# Altium PCB mainboard.PCBDOC
Units mil, origin at the board's own origin, x right, y up, seen from the top; angles counter-clockwise.
Board outline 6000 x 4000 mil, 2 copper layers (Top Layer, Bottom Layer); 25 components, 50 nets, 170 pads, 0 vias.
Unrouted connection lines stored in the file: 59.
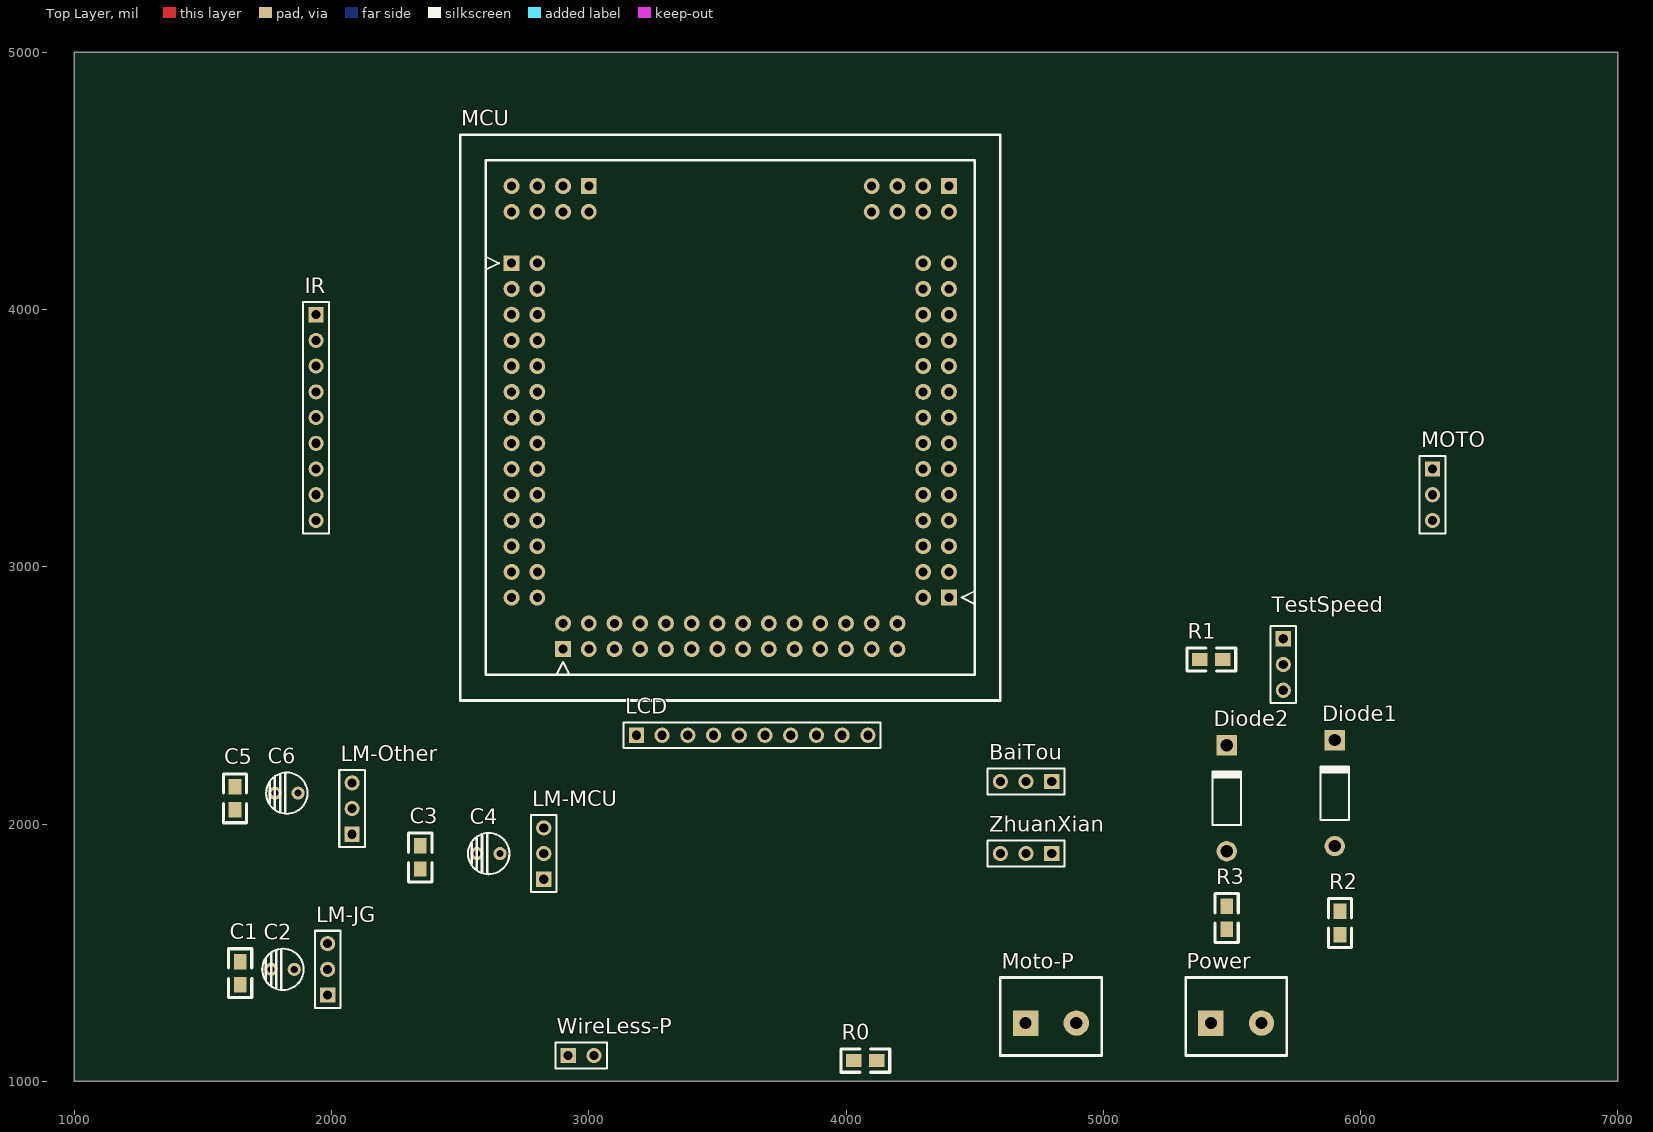
[diagram p0: Top Layer view]
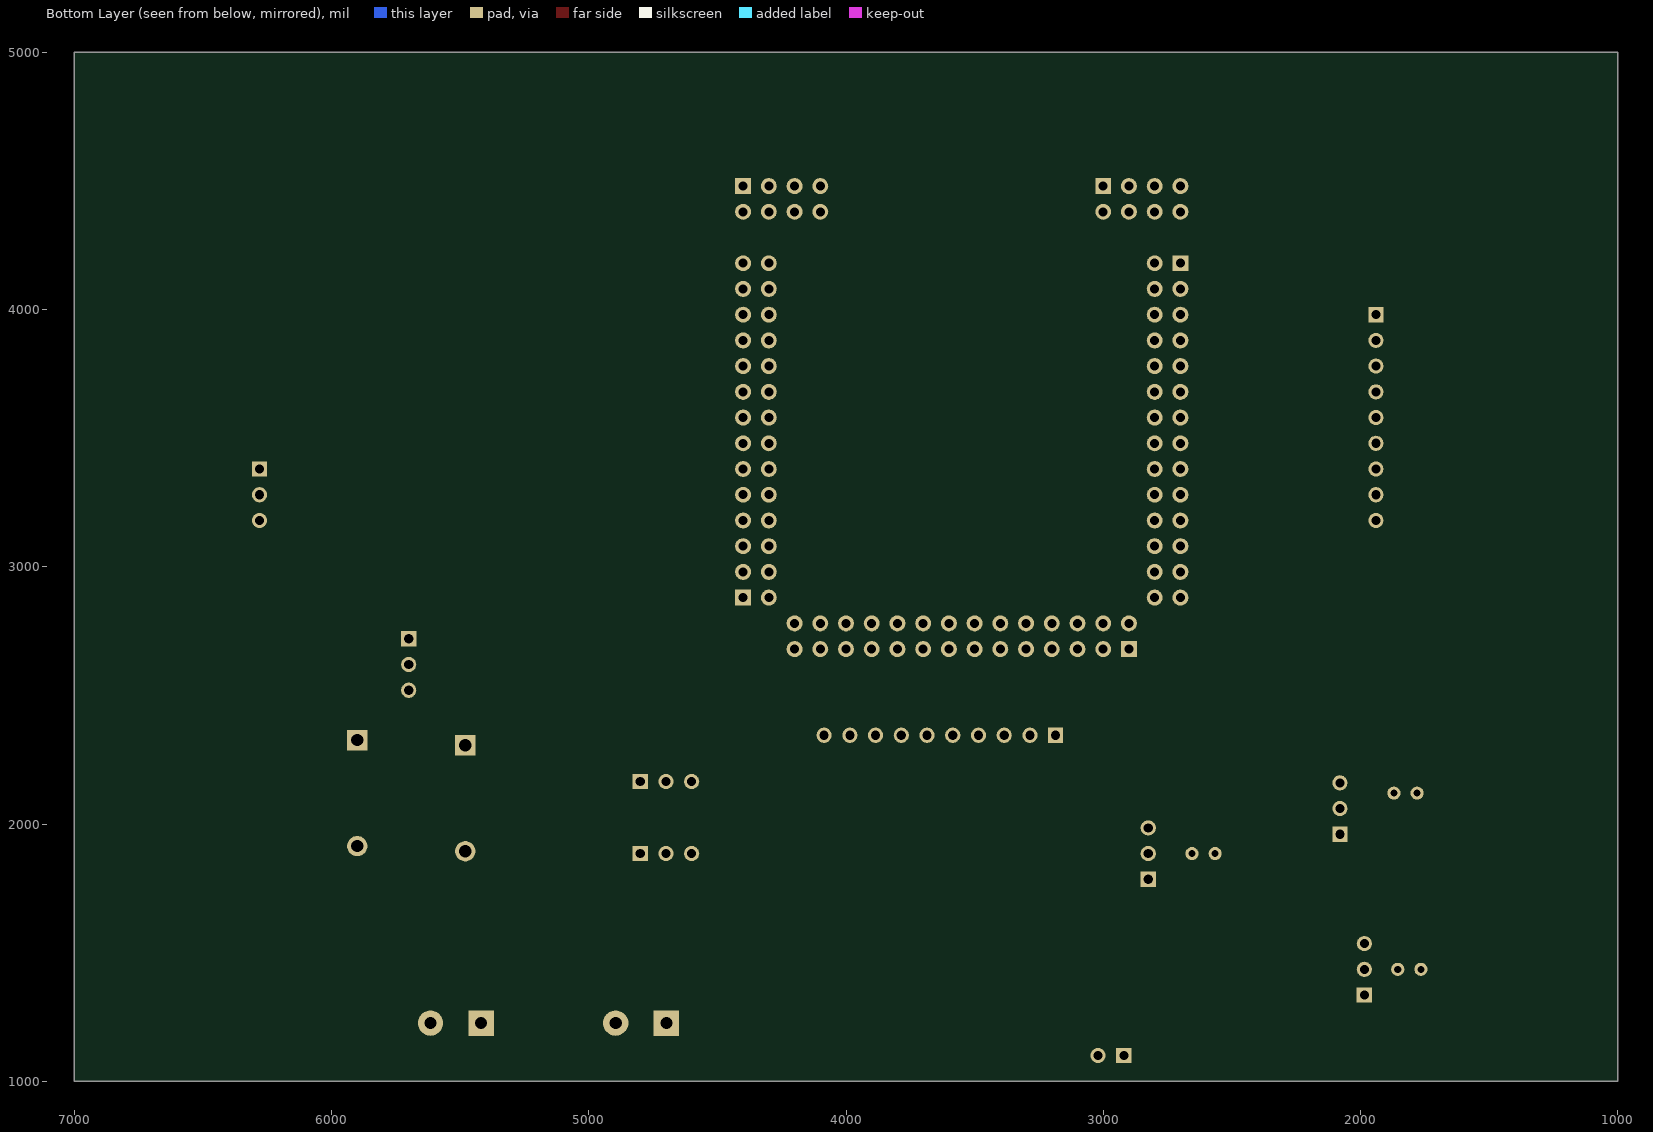
[diagram p1: Bottom Layer view, seen from below]

## Layer stack, top to bottom
Top Layer: signal copper 1.4
Dielectric: dielectric 12.6, FR-4, Dk 4.8
Bottom Layer: signal copper 1.4

## Board outline
1000,1000 7000,1000 7000,5000 1000,5000

## Design rules (kind name [scope] priority, off if disabled: settings)
Clearance [All] p1: gap=10
ComponentClearance [All] p1: gap=10 collisioncheckmode=3 verticalgap=10
PolygonConnect [All] p1: connectstyle=Relief reliefconductorwidth=10 reliefentries=4 polygonreliefangle="90 Angle"
RoutingVias [All] p1: holewidth=28 width=50 viastyle="Through Hole" minholewidth=28 minwidth=50 maxholewidth=28 maxwidth=50
SolderMaskExpansion [All] p1: expansion=4
TestPointUsage [All] p1: valid=0 allowmultiple=FALSE
Testpoint [All] p1: side=15 testpointundercomponent=TRUE minsize=40 maxsize=100 preferedsize=60 minholesize=0 maxholesize=40 preferedholesize=32 testpointgrid=1 style=1023 order=0123456789
Width [All] p1: maxlimit=10 minlimit=10 preferedwidth=10
18 further rules are at their usual default settings.

## Classes and differential pairs
component class MCU: MCU

## Components (designator, comment, footprint, x,y, rotation, side; value= is the part's Value field where it differs from the comment)
BaiTou "激光摆头舵机接口" HDR1X3 4800,2165 r180 top
C1 "47uF" 0805 1645,1375 r90 top
C2 "47uF" CD4 1805,1435 r0 top
C3 "47uF" 0805 2345,1825 r90 top
C4 "47uF" CD4 2605,1885 r0 top
C5 "47uF" 0805 1625,2055 r90 top
C6 "47uF" CD4 1820,2120 r0 top
Diode1 "Diode 1N5819" DO-41 5900,2120 r90 top
Diode2 "Diode 1N5819" DO-41 5480,2100 r90 top
IR "红外模块接口" HDR1X9 1940,3980 r270 top
LCD "LCD显示接口" HDR1X10 3185,2345 r0 top
LM-JG "激光供电模块" HDR1X3 1985,1335 r90 top
LM-MCU "单片机供电模块" HDR1X3 2825,1785 r90 top
LM-Other "其他供电模块" HDR1X3 2080,1960 r90 top
MCU "龙丘单片机" LQ_112_BOARD 2900,2680 r90 top
MOTO "电机模块" HDR1X3 6280,3380 r270 top
Moto-P "电机电源" tongzhu 4600,1100 r0 top
Power "电源" tongzhu 5320,1100 r0 top
R0 "0欧姆" 0805 4120,1080 r180 top
R1 "测速电阻" 0805 5465,2640 r180 top
R2 "6欧姆" 0805 5920,1660 r270 top
R3 "6欧姆" 0805 5480,1680 r270 top
TestSpeed "测速模块" HDR1X3 5700,2720 r270 top
WireLess-P "无线电源模块" HDR1X2 2920,1100 r0 top
ZhuanXian "摆角舵机" HDR1X3 4800,1885 r180 top

## Footprints (in the part's own frame and the unit in brackets; to place one, negate y for a bottom-side part, rotate by r counter-clockwise, add the part's x,y. Pads: shape width x height; smd on the part's side, far side on the other; paste and mask are expansions set on the pad)
0805 [mil]
  rect 60x50 smd: 1(0,0) 2(90,0)
  silkscreen extent -50,-45 140,45
CD4 [mm]
  round 1.3 hole 0.7: 1(1.27,0) 2(-1.016,0)
  silkscreen extent -1.89,-2.04 2.19,2.04
DO-41 [mm] "Diode, Axial; Body 5.2 x 2.7 mm (LxDia. max), Lead Dia. 0.86 mm (max)"
  round 2 hole 1.2: 1(-5.23,0)
  rect 2x2 hole 1.2: 2(5.23,0)
  silkscreen extent -2.65,-1.4 2.75,1.4
HDR1X2 [mm] "Connector; Header; 2 Position"
  rect 1.5x1.5 hole 0.9: 1(0,0)
  round 1.5 hole 0.9: 2(2.54,0)
  silkscreen extent -1.27,-1.27 3.81,1.27
HDR1X3 [mm] "Connector; Header; 3 Position"
  rect 1.5x1.5 hole 0.9: 1(0,0)
  round 1.5 hole 0.9: 2(2.54,0) 3(5.08,0)
  silkscreen extent -1.27,-1.27 6.35,1.27
HDR1X9 [mm] "Connector; Header; 9 Position"
  rect 1.5x1.5 hole 0.9: 1(0,0)
  round 1.5 hole 0.9: 2(2.54,0) 3(5.08,0) 4(7.62,0) 5(10.16,0) 6(12.7,0) 7(15.24,0) 8(17.78,0) 9(20.32,0)
  silkscreen extent -1.27,-1.27 21.59,1.27
HDR1X10 [mm] "Connector; Header; 10 Position"
  rect 1.5x1.5 hole 0.9: 1(0,0)
  round 1.5 hole 0.9: 2(2.54,0) 3(5.08,0) 4(7.62,0) 5(10.16,0) 6(12.7,0) 7(15.24,0) 8(17.78,0) 9(20.32,0) 10(22.86,0)
  silkscreen extent -1.27,-1.27 24.13,1.27
LQ_112_BOARD [mil]
  rect 62x62 hole 35: 101(200,-1500) 201(0,0) 301(1500,200) 401(1800,-1500) 501(1800,-100)
  round 62 hole 35: 102(200,-1400) 103(300,-1500) 104(300,-1400) 105(400,-1500) 106(400,-1400) 107(500,-1500) 108(500,-1400) 109(600,-1500) 110(600,-1400) 111(700,-1500) 112(700,-1400) 113(800,-1500) 114(800,-1400) 115(900,-1500) 116(900,-1400) 117(1000,-1500) 118(1000,-1400) 119(1100,-1500) 120(1100,-1400) 121(1200,-1500) 122(1200,-1400) 123(1300,-1500) 124(1300,-1400) 125(1400,-1500) 126(1400,-1400) 127(1500,-1500) 128(1500,-1400) 202(100,0) 203(0,-100) 204(100,-100) 205(0,-200) 206(100,-200) 207(0,-300) 208(100,-300) 209(0,-400) 210(100,-400) 211(0,-500) 212(100,-500) 213(0,-600) 214(100,-600) 215(0,-700) 216(100,-700) 217(0,-800) 218(100,-800) 219(0,-900) 220(100,-900) 221(0,-1000) 222(100,-1000) 223(0,-1100) 224(100,-1100) 225(0,-1200) 226(100,-1200) 227(0,-1300) 228(100,-1300) 302(1500,100) 303(1400,200) 304(1400,100) 305(1300,200) 306(1300,100) 307(1200,200) 308(1200,100) 309(1100,200) 310(1100,100) 311(1000,200) 312(1000,100) 313(900,200) 314(900,100) 315(800,200) 316(800,100) 317(700,200) 318(700,100) 319(600,200) 320(600,100) 321(500,200) 322(500,100) 323(400,200) 324(400,100) 325(300,200) 326(300,100) 327(200,200) 328(200,100) 402(1700,-1500) 403(1800,-1400) 404(1700,-1400) 405(1800,-1300) 406(1700,-1300) 407(1800,-1200) 408(1700,-1200) 502(1700,-100) 503(1800,0) 504(1700,0) 505(1800,100) 506(1700,100) 507(1800,200) 508(1700,200)
  silkscreen extent -200,-1700 2000,400
tongzhu [mm]
  rect 2.5x2.5 hole 1.2: 1(2.5,3.2)
  round 2.5 hole 1.2: 2(7.5,3.2)
  silkscreen extent 0,0 10,7.7

## Part data
BaiTou LM-JG LM-MCU LM-Other MOTO TestSpeed ZhuanXian: library part "Header 3", "Header, 3-Pin"
C1 C3 C5: library part Cap, "Capacitor"
C2 C4 C6: library part "Cap Pol1", "Polarized Capacitor (Radial)"
Diode1 Diode2: library part "Diode 1N4007", "1 Amp General Purpose Rectifier"
IR: library part "Header 9", "Header, 9-Pin"
LCD: library part "Header 10", "Header, 10-Pin"
MCU: library part LQ_112_BOARD, "LQ_112_BOARD"
Moto-P Power WireLess-P: library part "Header 2", "Header, 2-Pin"
R0 R1 R2 R3: library part Res2, "Resistor"

## Nets (pads, with @x,y where several pads share a name; then routed paths per layer and width w, separated by ;. In a path a pad name is that pad's centre, name@x,y a point inside that pad or via, vN(x,y) a via of type N, cw(c..) or ccw(c..) an arc to the next point about the centre after c; other vN are vias at no path point)
0: IR.3 MCU.309
1: IR.4 MCU.311
2: IR.5 MCU.313
3: IR.6 MCU.315
4: IR.7 MCU.317
5: IR.8 MCU.319
6: IR.9 MCU.321
8: MCU.310
9: MCU.312
10: MCU.314
11: MCU.316
12: MCU.318
A0: MCU.301
A1: MCU.302
A2: MCU.303
A3: MCU.304
A4: MCU.305
A5: MCU.306
A6: MCU.307
B0: MCU.121
B2: MCU.123
B4: MCU.125
B6: MCU.127
BVCC: BaiTou.2 Diode1.2 Diode2.2 ZhuanXian.2
DGND: LM-JG.2 LM-Other.2 R0.1
GND: BaiTou.3 IR.1 LCD.9 LM-MCU.2 MCU.328 Moto-P.2 Power.2 R0.2 TestSpeed.3 WireLess-P.2 ZhuanXian.3
I/O: MCU.128 MOTO.1
JVCC: C2.1 LM-JG.3
M0: LCD.5 MCU.221
M1: LCD.4 MCU.222
M2: LCD.3 MCU.219
M3: LCD.2 MCU.220
M4: LCD.1 MCU.217
M5: LCD.6 MCU.218
M6: LCD.7 MCU.205
M7: LCD.8 MCU.206
MVCC: C4.1 LM-MCU.3 MCU.327 WireLess-P.1
NetC1_2: C1.2 C2.2
NetC3_2: C3.2 C4.2
NetC5_2: C5.2 C6.2
NetDiode1_1: Diode1.1 R2.1
NetDiode2_1: Diode2.1 R3.1
NetR1_1: R1.1 TestSpeed.1
PWM1: MCU.103 MOTO.2
PWM2: MCU.101 MOTO.3
PWM3: BaiTou.1 MCU.227
PWM4: MCU.225 ZhuanXian.1
QVCC: C6.1 IR.2 LCD.10 LM-Other.3 TestSpeed.2
T0: MCU.109 R1.2
VCC: C1.1 C3.1 C5.1 LM-JG.1 LM-MCU.1 LM-Other.1 Moto-P.1 Power.1 R2.2 R3.2
pads on no net: MCU.102 MCU.104 MCU.105 MCU.106 MCU.107 MCU.108 MCU.110 MCU.111 MCU.112 MCU.113 MCU.114 MCU.115 MCU.116 MCU.117 MCU.118 MCU.119 MCU.120 MCU.122 MCU.124 MCU.126 MCU.201 MCU.202 MCU.203 MCU.204 MCU.207 MCU.208 MCU.209 MCU.210 MCU.211 MCU.212 MCU.213 MCU.214 MCU.215 MCU.216 MCU.223 MCU.224 MCU.226 MCU.228 MCU.308 MCU.320 MCU.322 MCU.323 MCU.324 MCU.325 MCU.326 MCU.401 MCU.402 MCU.403 MCU.404 MCU.405 MCU.406 MCU.407 MCU.408 MCU.501 MCU.502 MCU.503 MCU.504 MCU.505 MCU.506 MCU.507 MCU.508